# Altium PCB Final_PCB.PcbDoc
Units mil, origin at the board's own origin, x right, y up, seen from the top; angles counter-clockwise.
Board outline 1645 x 1610 mil, 2 copper layers (Top Layer, Bottom Layer); 9 components, 11 nets, 32 pads, 2 vias.
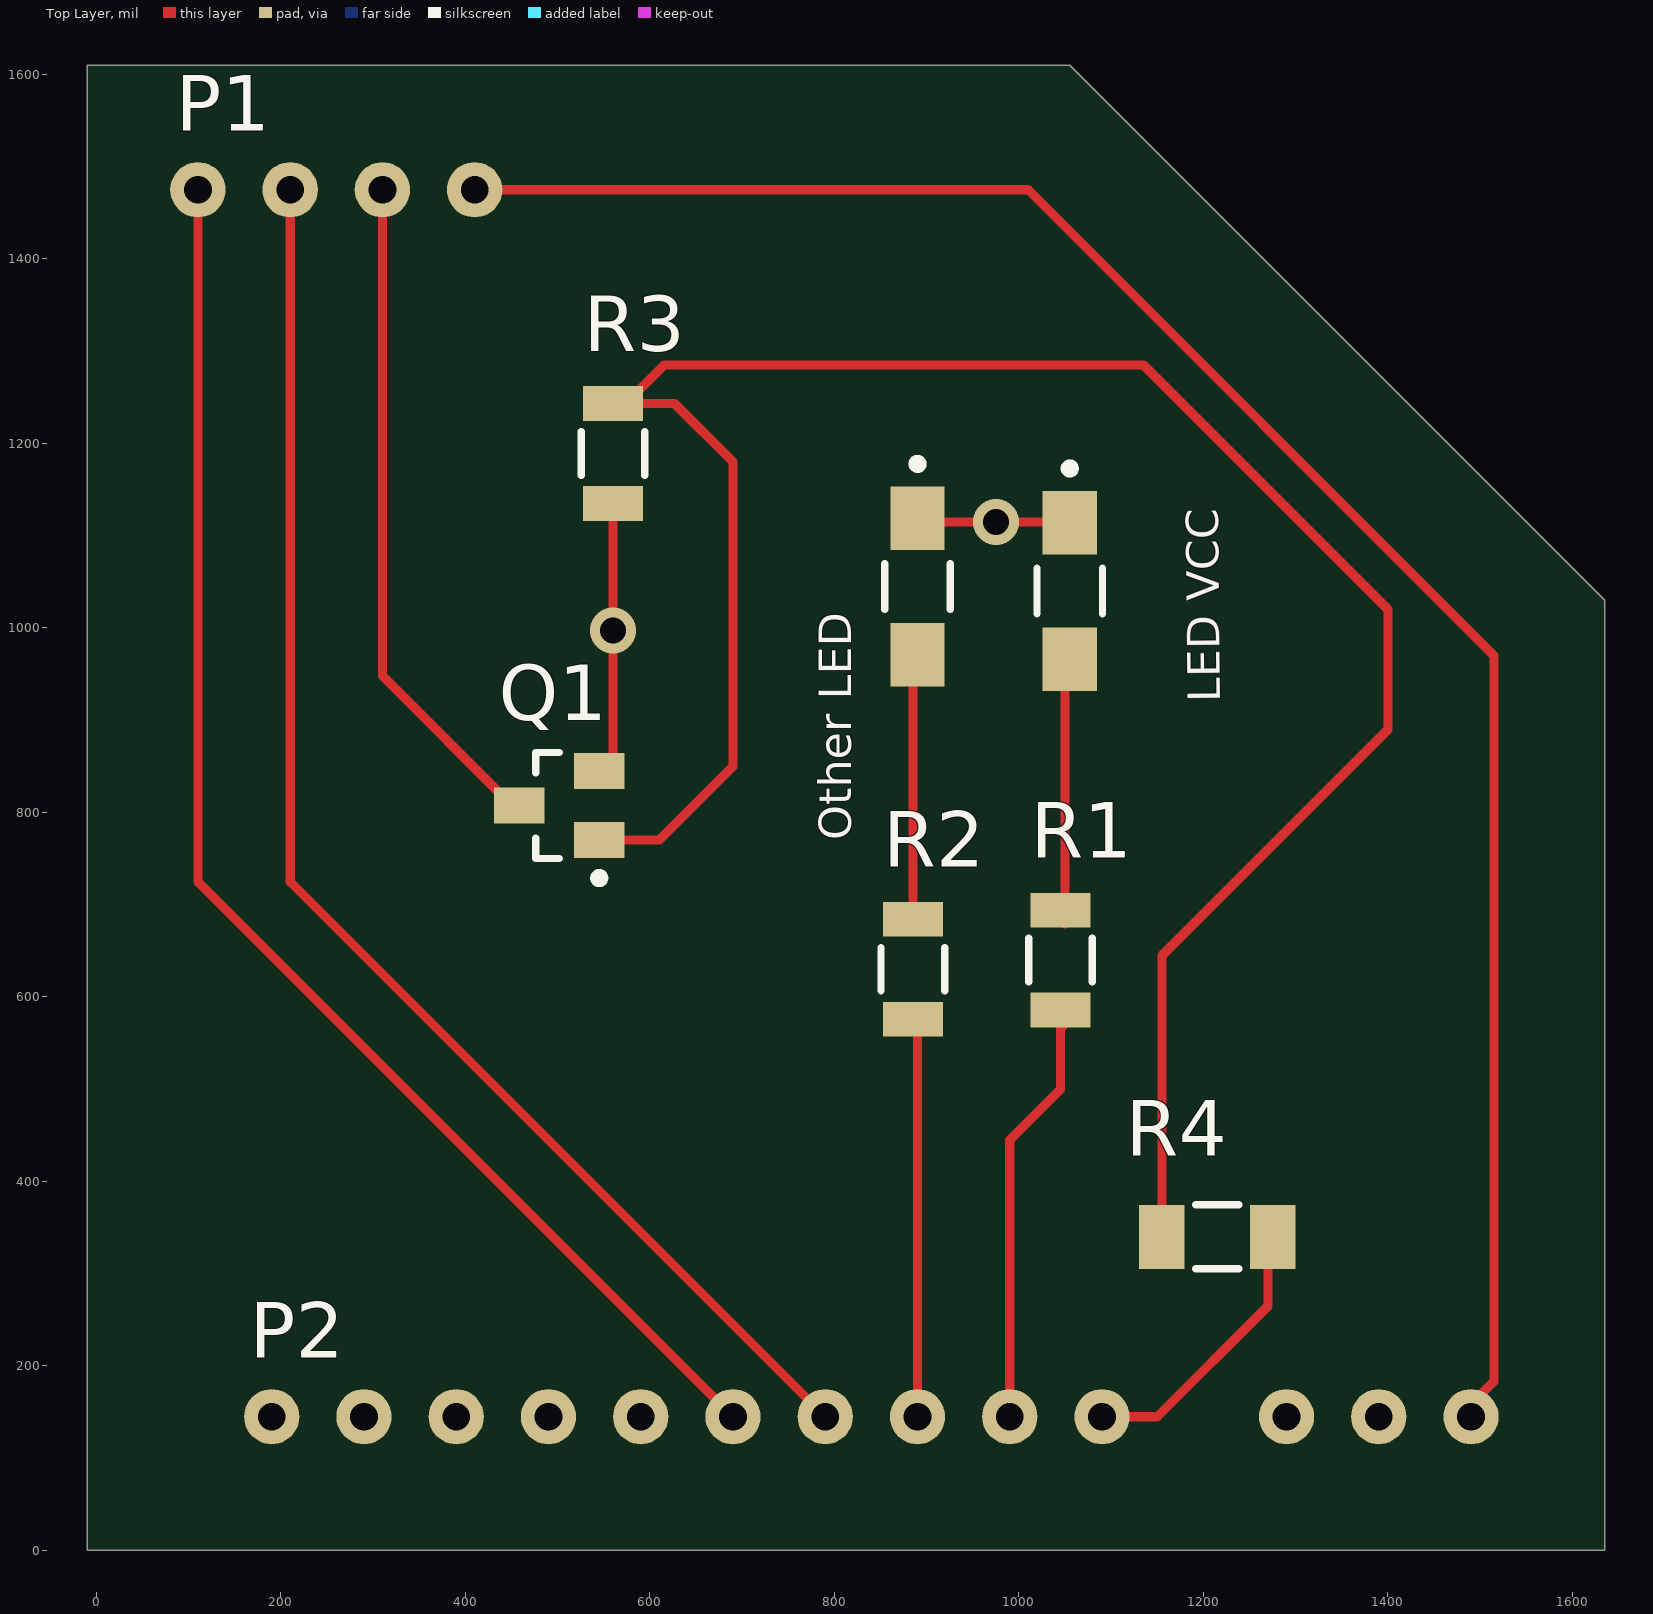
[diagram p0: Top Layer view]
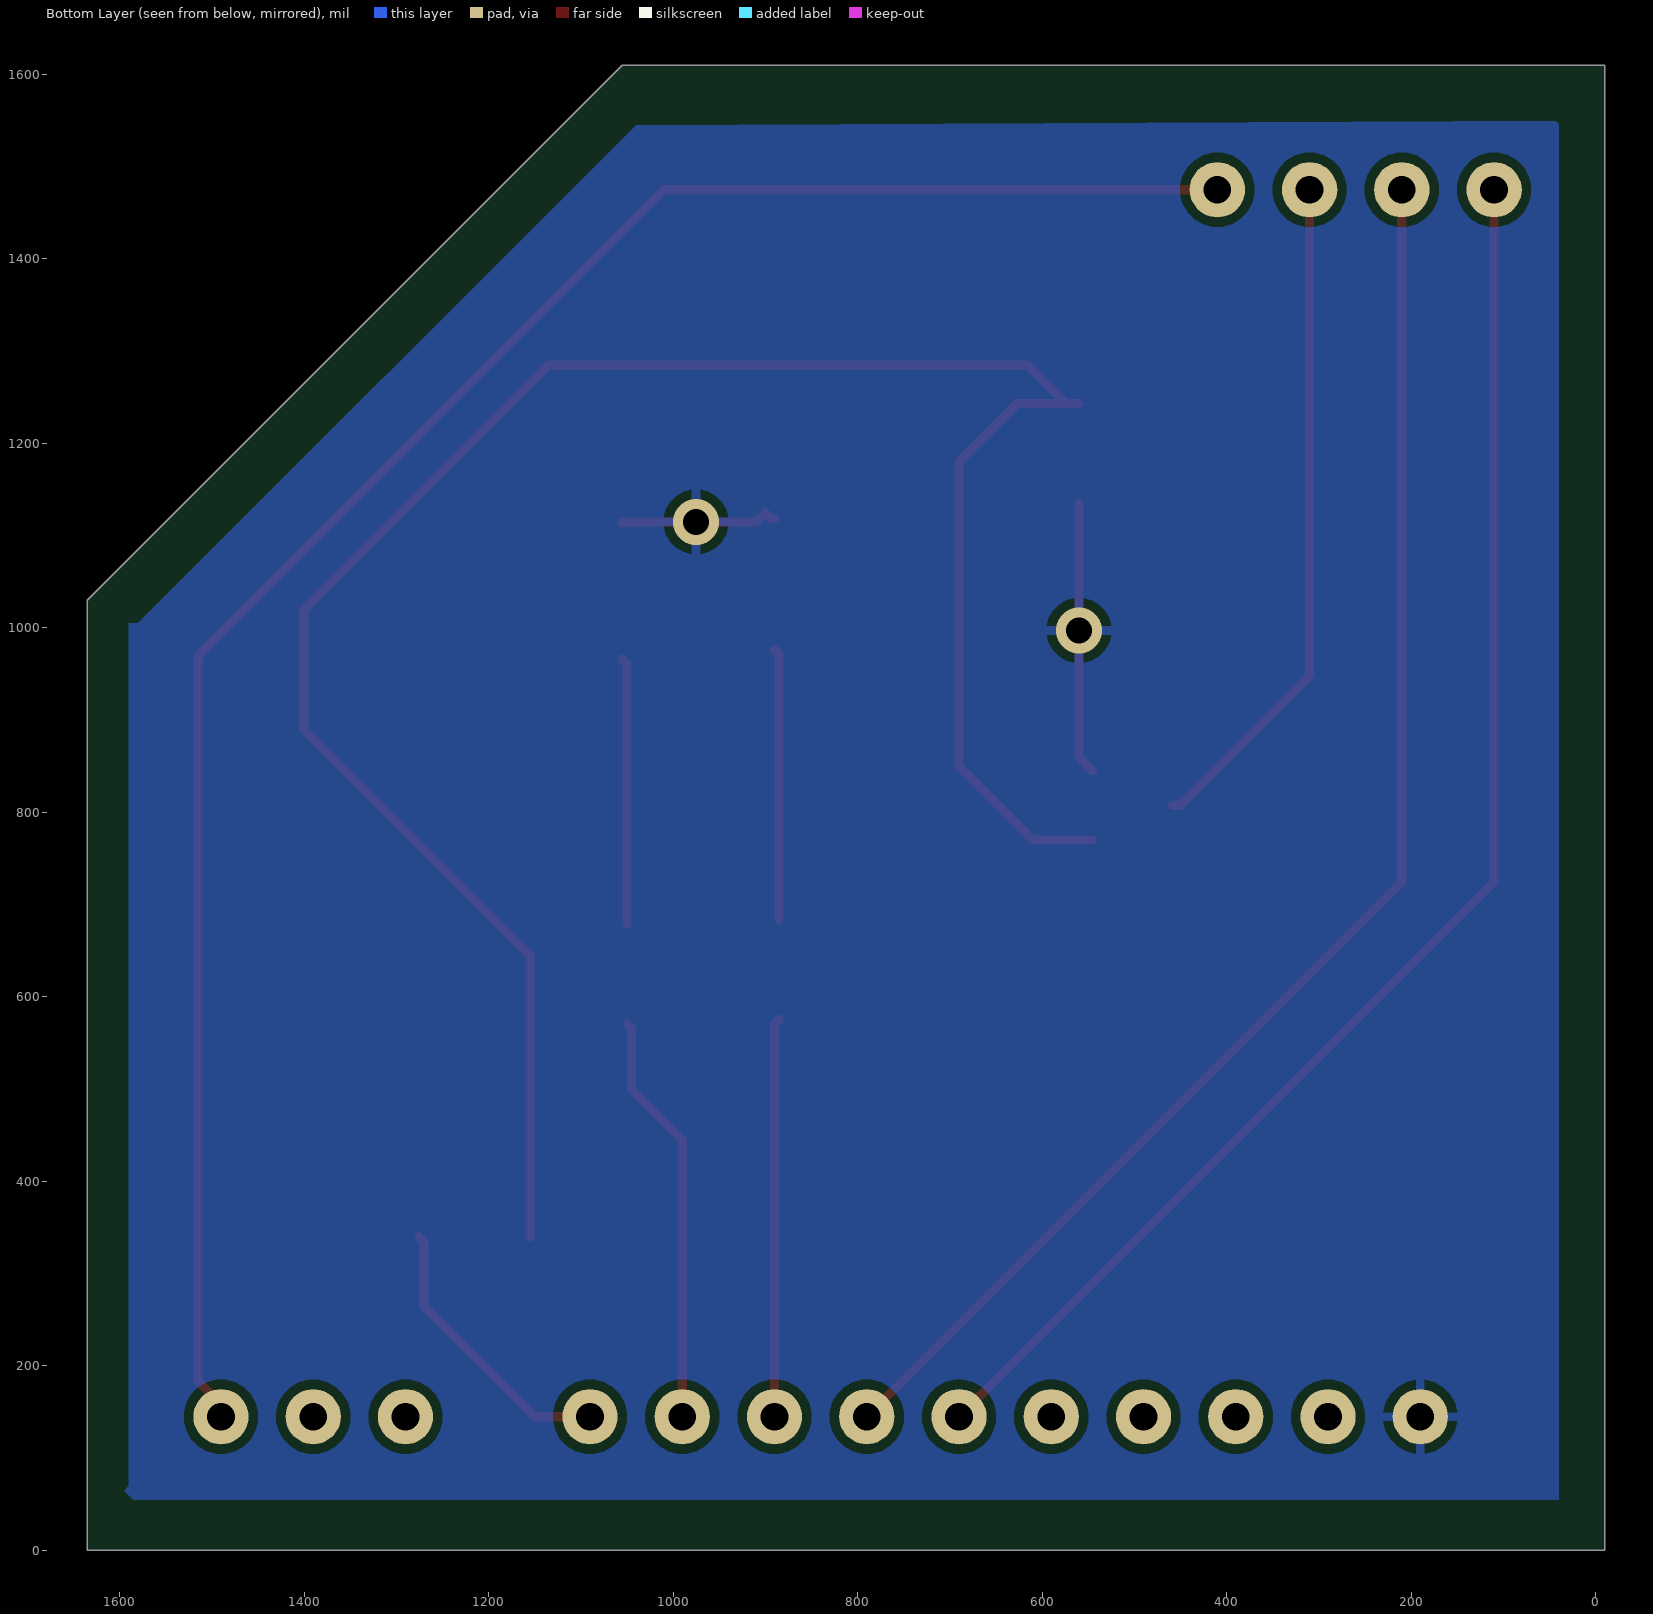
[diagram p1: Bottom Layer view, seen from below]

## Layer stack, top to bottom
Top Solder: solder mask 0.4, Solder Resist, Dk 3.5
Top Layer: signal copper 1.4
Dielectric 1: dielectric 12.6, FR-4, Dk 4.8
Bottom Layer: signal copper 1.4
Bottom Solder: solder mask 0.4, Solder Resist, Dk 3.5

## Board outline
-10,1610 -10,0 1635,0 1635,1030 1055,1610

## Design rules (kind name [scope] priority, off if disabled: settings)
Clearance [All] p1: gap=10 ignorepadtopadclearanceinfootprint=FALSE except(0: Arc-Hole Track-Hole SMDPad-Hole THPad-Hole Via-Hole Fill-Hole Poly-Hole Region-Hole Text-Hole)
PolygonConnect [All] p1: connectstyle=Relief reliefconductorwidth=10 reliefentries=4 polygonreliefangle="90 Angle" airgapwidth=10
RoutingVias [All] p1: holewidth=28 width=50 viastyle="Through Hole" minholewidth=28 minwidth=50 maxholewidth=28 maxwidth=50
SilkToSolderMaskClearance SilkToSolderMaskClearance_1 [All] p1: minsilkscreentomaskgap=5 clearancetoexposedcopper=TRUE
SilkToSolderMaskClearance [All] p2: minsilkscreentomaskgap=15 clearancetoexposedcopper=TRUE
SolderMaskExpansion [All] p1: expansion=4 istentingtop=FALSE
Width [All] p1: maxlimit=10 minlimit=10 preferedwidth=10
29 further rules are at their usual default settings.

## Classes and differential pairs
component class Designator3: "LED VCC" "Other LED" R1 R2
component class Designator2: P2
component class Designator: P1 Q1 R3 R4

## Components (designator, comment, footprint, x,y, rotation, side; value= is the part's Value field where it differs from the comment)
"LED VCC" "APTD3216CGCK" FP-APTD3216CGCK-MFG 1055,1040 r270 top
"Other LED" "APTD3216CGCK" FP-APTD3216CGCK-MFG 890,1045 r270 top
P1 "Temp Sensor" "1X4 HEADER" 210,1675 r180 top
P2 "Launchpad" "MSP430MG2553 Single Row (13 Pin)" 190,-1655 r0 top
Q1 "BSS123" FAIR-SOT23-3_V 501.69,807.6 r90 top
R1 "RC3216J103CS" FP-RC3216-IPC_C 1045,640 r90 top
R2 "RC3216J103CS" FP-RC3216-IPC_C 885,630 r90 top
R3 "10k" FP-RC3216-IPC_C 560,1189.16 r270 top
R4 "" FP-CR1206-IPC_A 1215,340 r180 top

## Footprints (in the part's own frame and the unit in brackets; to place one, negate y for a bottom-side part, rotate by r counter-clockwise, add the part's x,y. Pads: shape width x height; smd on the part's side, far side on the other; paste and mask are expansions set on the pad)
"1X4 HEADER" [mil]
  round 60 hole 30: 1(-200,200) 2(-100,200) 3(0,200) 4(100,200)
FAIR-SOT23-3_V [mm] "SOT23, 3-Leads, Body 2.92x1.3mm, Pitch 0.95mm"
  rect 1x1.4 smd: 1(-0.95,-1.1) 2(0.95,-1.1) 3(0,1.1)
  silkscreen extent -2.12,-1.23 1.46,0.65, body extent -1.46,-0.65 1.46,0.65, height 1.2
FP-APTD3216CGCK-MFG [mm]
  rect 1.75x1.5 smd paste+0 mask+0: 1(-1.875,0) 2(1.875,0)
  silkscreen extent -3.5,-0.9 0.63,0.9, body extent -2.85,-1 2.85,1, height 0.25
FP-CR1206-IPC_A [mil]
  rect 49.53x69.38 smd paste+0 mask+0: 1(-60.12,0) 2(60.12,0)
  silkscreen extent -24,-35 24,35, body extent -105,-54 105,54, height 10
FP-RC3216-IPC_C [mil]
  rect 37.59x65.28 smd paste+0 mask+0: 1(-54.16,0) 2(54.16,0)
  silkscreen extent -24,-34 24,34, body extent -77,-38 77,38, height 10
"MSP430MG2553 Single Row (13 Pin)" [mil] "13 pin header for one side of MSP430MG2553"
  round 60 hole 30: 11(900,1800) 12(800,1800) 13(700,1800) 14(600,1800) 15(500,1800) 16(400,1800) 17(300,1800) 18(200,1800) 19(100,1800) 20(0,1800) 21(1100,1800) 22(1200,1800) 23(1300,1800)

## Part data
"LED VCC" "Other LED": library part CMP-2000-05792-2, "LED GREEN CLEAR 2SMD", Case Code (Imperial)=1206, Case Code (Metric)=3216, Color=Green, Forward Current=20mA, Forward Voltage=2.1V, Lens Color=Clear, Max Operating Temperature=85°C, Min Operating Temperature=-40°C, Package Quantity=2000, Case/Package=1206, Dominant Wavelength=570nm, Height=1.8mm, Illumination Color=Green, Lead Free="Lead Free", Length=3.2mm, Lens Style=Clear, Luminous Intensity=300mcd, Mount="Surface Mount", Number of LEDs=1, Number of Pins=2, Packaging="Tape and Reel", Test Current=20mA, Viewing Angle=50°, Width=1.6mm
P1: library part "1X4 HEADER"
P2: library part "MSP430MG2553 Single Row (13 Pin)", "13 pin header for one side of MSP430MG2553", Manufacturer="Texas Instruments", Manufacturer Part Number=MSP-EXP430G2, Package Quantity=1, Supplier Part Number 1=39AH9021, Category="Embedded Processors and Controllers", ComponentLink1Description=https://datasheet.ciiva.com/2398/slay017-2398228.pdf?src-supplier=Digi-Key, ComponentLink1URL=https://datasheet.ciiva.com/2398/slay017-2398228.pdf?src-supplier=Digi-Key, ComponentLink2Description=https://datasheet.ciiva.com/27059/2207275-27059764.pdf?src-supplier=Jameco, ComponentLink2URL=https://datasheet.ciiva.com/27059/2207275-27059764.pdf?src-supplier=Jameco, ComponentLink3Description=https://datasheet.ciiva.com/20167/73-4724-20167738.pdf?src-supplier=Rapid+Electronics, ComponentLink3URL=https://datasheet.ciiva.com/20167/73-4724-20167738.pdf?src-supplier=Rapid+Electronics, ComponentLink4Description=https://datasheet.ciiva.com/26344/414784-da-01-en-launchpad-devel-tool-msp-exp430g2-tid-26344585.pdf?src-supplier=Conrad, ComponentLink4URL=https://datasheet.ciiva.com/26344/414784-da-01-en-launchpad-devel-tool-msp-exp430g2-tid-26344585.pdf?src-supplier=Conrad, Core Architecture=MSP430, Data Bus Width=16b, Evaluation Kit=Yes, Height=1.97inch, Interface=USB, Length=3.94inch, Mount=Socket, Number of Bits=16, Number of Pins=0.7, Packaging=Bulk, Radiation Hardening=No, REACH SVHC="No SVHC", RoHS=Yes, Supplier 1=Newark, Weight=0.22lb, Width=3.94inch
Q1: library part CMP-2000-04934-1, "N-Channel Logic Level Enhancement Mode Field Effect Transistor, 1.7 V, -55 to 150 degC, 3-Pin SOT-23, RoHS, Tape and Reel", Manufacturer=Fairchild, Maximum Continuous Drain Current=0.17A, Maximum Drain Source Voltage=100V, Maximum Gate Source Voltage=±20V, Operating Temperature=-55to150degC, Package=3SOT-23, Package Description="3-Pin Small Outline Transistor, Body 2.92 x 1.325 mm, Pitch 0.95 mm", Package Reference=SOT23-3, Package Version="Rev. 12, 03/2016", Category=MOSFET, Channel Mode=Enhancement, Channel Type=N, Datasheet URL=https://www.fairchildsemi.com/datasheets/BS/BSS123.pdf, Datasheet Version=Jun-03, Manufacturer URL=https://www.fairchildsemi.com/, Mounting=SurfaceMount, Package URL=http://www.fairchildsemi.com/dwg/MA/MA03D.pdf, Packaging=Tape&Reel, Rad Hard=No, RDS-on=6000@10VmOhm, Typical Fall Time=2.4ns, Typical Rise Time=9ns, Typical Turn-Off Delay Time=17ns, Typical Turn-On Delay Time=1.7ns
R1 R2 R3: library part CMP-13261-005388-1, "Res Thick Film 1206 10kΩ 5% 0.25W ±100ppm/°C Molded SMD T/R", Case Code (Imperial)=1206, Case Code (Metric)=3216, Max Operating Temperature=155°C, Max Power Dissipation=250mW, Min Operating Temperature=-55°C, Resistance=10kR, Temperature Coefficient=100ppm/°C, Tolerance=5%, Voltage Rating (DC)=200V, Case/Package=1206, Composition="Thick Film", Contact Plating=Tin, Depth=1.6mm, Features="Moisture Resistant", Height=0.026inch, Lead Free="Lead Free", Length=0.126inch, Military Standard=Not, Number of Terminations=2, Packaging="Tape and Reel", Radiation Hardening=No, Width=0.063inch
R4: library part CMP-07231-000980-1, "Thick Film Chip Resistors 1206 100Ω 0.25W 1% 100ppm/°C", Case Code (Imperial)=1206, Case Code (Metric)=3216, Max Operating Temperature=155°C, Max Power Dissipation=250mW, Min Operating Temperature=-55°C, Package Quantity=1, Resistance=100R, Temperature Coefficient=100ppm/°C, Tolerance=1%, Voltage Rating=200V, Case/Package=1206, Composition="Thick Film", Contact Plating=Tin, Depth=1.6mm, Features="Moisture Resistant", Height=0.03inch, Height - Seated (Max)=0.03inch, Length=0.126inch, Military Standard=Not, Mount="Surface Mount", Number of Terminations=2, Packaging="Tape and Reel", Power Rating=250mW, Radiation Hardening=No, Termination=SMD/SMT, Thickness=610um, Width=0.063inch

## Via types
v1: diameter 50, hole 28, Top Layer to Bottom Layer, 2 vias

## Nets (pads, with @x,y where several pads share a name; then routed paths per layer and width w, separated by ;. In a path a pad name is that pad's centre, name@x,y a point inside that pad or via, vN(x,y) a via of type N, cw(c..) or ccw(c..) an arc to the next point about the centre after c; other vN are vias at no path point)
GND: "LED VCC.1" "Other LED.1" P2.20 Q1.2 R3.2 | length 468.6
  Top Layer w10: Q1.2 545.31,845 560,859.69 R3.2 ; 890,1118.82 893.82,1118.82 900,1125 910,1115 v1(975,1115) 1053.82,1115 1055,1113.82
  other v1: 560,997.34
LED_SENSE1: P2.13 R2.1 | length 440
  Top Layer w10: R2.1 890,570.84 890,150 895,145 P2.13
LED_SENSE2: "Other LED.2" R2.2 | length 294.1
  Top Layer w10: R2.2 885,971.18 890,976.18
LED_VCC1: P2.12 R1.1 | length 450.7
  Top Layer w10: P2.12 990,445 1045,500 1045,565.84 R1.1@1050,570.84
LED_VCC2: "LED VCC.2" R1.2 | length 289.1
  Top Layer w10: R1.2@1050,679.16 1050,961.18 1055,966.18
NFET_DRAIN: P1.2 Q1.3 | length 733.5
  Top Layer w10: P1.2 310,948.11 450.51,807.6 Q1.3
NFET_GATE1: P2.11 R4.1 | length 306.9
  Top Layer w10: P2.11 1150,145 1270,265 1270,334.76 R4.1@1275.24,340
NFET_GATE2: Q1.1 R3.1 R4.2 | length 2399
  Top Layer w10: Q1.1 610.2,770.2 690,850 690,1180 626.68,1243.32 R3.1@573.84,1243.32 ; R3.1 R3.1@573.84,1243.32 ; R4.2@1155,340 1155,645 1400,890 1400,1020 1135,1285 615.53,1285 R3.1@573.84,1243.32
SCL: P1.3 P2.14 | length 1570.2
  Top Layer w10: P1.3 210,725 P2.14
SDA: P1.4 P2.15 | length 1570.2
  Top Layer w10: P1.4 110,725 P2.15
VCC: P1.1 P2.23 | length 2149.5
  Top Layer w10: P1.1 1010,1475 1515,970 1515,183.53 1490,158.53 P2.23
pads on no net: P2.16 P2.17 P2.18 P2.19 P2.21 P2.22

## Polygon pours and split planes (outlines as drawn)
GND on Bottom Layer "GND_L02_P002" (solid, pour order 2): 40,1550 40,55 1585,55 1595,65 1590,70 1590,1005 1580,1005 1040,1545